# Altium PCB Acoustics Board.PcbDoc
Units mil, origin at the board's own origin, x right, y up, seen from the top; angles counter-clockwise.
Board outline 5000 x 3000 mil, 2 copper layers (Top Layer, Bottom Layer); 50 components, 24 nets, 214 pads, 9 vias.
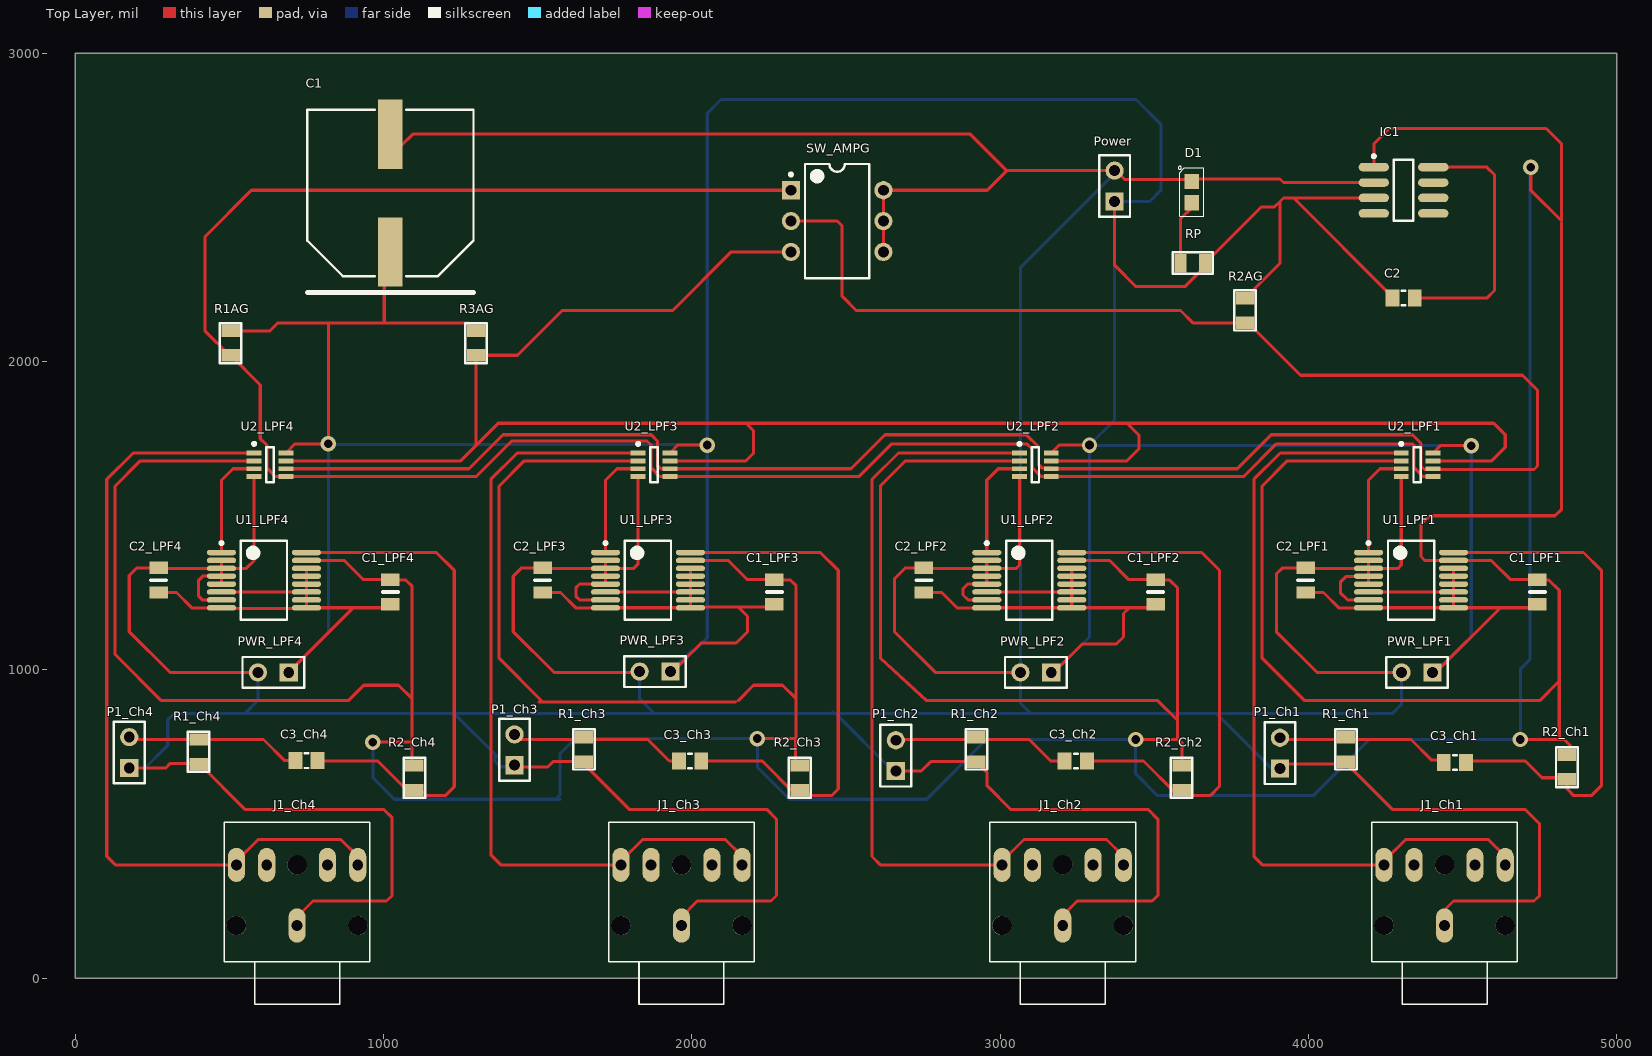
[diagram p0: Top Layer view]
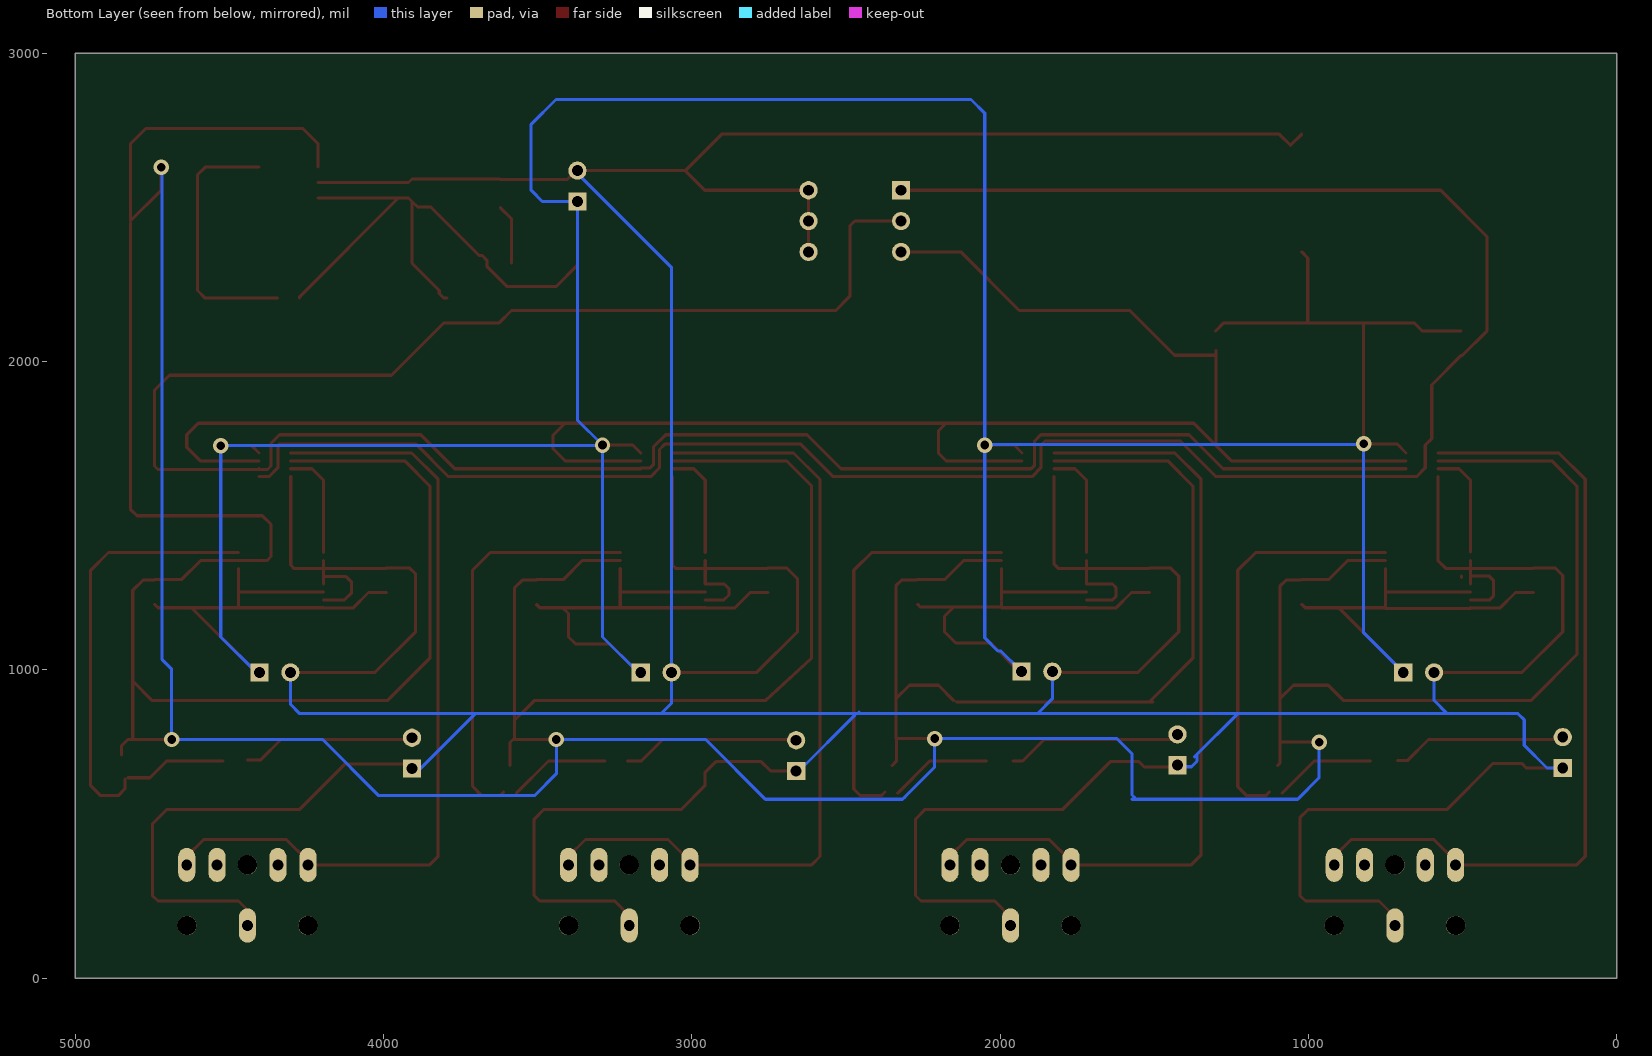
[diagram p1: Bottom Layer view, seen from below]

## Layer stack, top to bottom
Top Solder: solder mask 0.4, Solder Resist, Dk 3.5
Top Layer: signal copper 1.4
Dielectric 1: dielectric 12.6, FR-4, Dk 4.8
Bottom Layer: signal copper 1.4
Bottom Solder: solder mask 0.4, Solder Resist, Dk 3.5

## Board outline
0,0 5000,0 5000,3000 0,3000

## Design rules (kind name [scope] priority, off if disabled: settings)
Clearance [All] p1: gap=10 ignorepadtopadclearanceinfootprint=TRUE except(0: Arc-Hole Track-Hole SMDPad-Hole THPad-Hole Via-Hole Fill-Hole Poly-Hole Region-Hole Text-Hole)
PolygonConnect [All] p1: connectstyle=Relief reliefconductorwidth=10 reliefentries=4 polygonreliefangle="90 Angle" airgapwidth=10
RoomDefinition Ch2 [InComponentClass('Ch2')] p1: confinementstyle=ConfineIn formatcopy=TRUE lockcomponents=FALSE outline 2561.6,-150 3761.6,-150 3761.6,900 2561.6,900
RoomDefinition Ch1 [InComponentClass('Ch1')] p2: confinementstyle=ConfineIn formatcopy=TRUE lockcomponents=FALSE outline 3800,-150 5000,-150 5000,900 3800,900
RoomDefinition Ch4 [InComponentClass('Ch4')] p3: confinementstyle=ConfineIn formatcopy=TRUE lockcomponents=FALSE outline 77.85,-150 1277.85,-150 1277.85,900 77.85,900
RoomDefinition Ch3 [InComponentClass('Ch3')] p4: confinementstyle=ConfineIn formatcopy=TRUE lockcomponents=FALSE outline 1324.8,-150 2524.8,-150 2524.8,900 1324.8,900
RoomDefinition LPF4 [InComponentClass('LPF4')] p5: confinementstyle=ConfineIn formatcopy=TRUE lockcomponents=FALSE outline 79.16,919.84 1279.16,919.84 1279.16,1869.84 79.16,1869.84
RoomDefinition LPF3 [InComponentClass('LPF3')] p6: confinementstyle=ConfineIn formatcopy=TRUE lockcomponents=FALSE outline 1324.81,919.84 2524.81,919.84 2524.81,1869.84 1324.81,1869.84
RoomDefinition LPF2 [InComponentClass('LPF2')] p7: confinementstyle=ConfineIn formatcopy=TRUE lockcomponents=FALSE outline 2561.6,919.84 3761.6,919.84 3761.6,1869.84 2561.6,1869.84
RoomDefinition LPF1 [InComponentClass('LPF1')] p8: confinementstyle=ConfineIn formatcopy=TRUE lockcomponents=FALSE outline 3800,919.84 5000,919.84 5000,1869.84 3800,1869.84
RoomDefinition "Acoustics Board" [InComponentClass('Acoustics Board')] p9: confinementstyle=ConfineIn formatcopy=TRUE lockcomponents=FALSE outline 221.27,1930.75 4921.27,1930.75 4921.27,2941.01 221.27,2941.01
RoutingVias [All] p1: holewidth=28 width=50 viastyle="Through Hole" minholewidth=28 minwidth=50 maxholewidth=28 maxwidth=50
SolderMaskExpansion [All] p1: expansion=4
Width [All] p1: maxlimit=10 minlimit=10 preferedwidth=10
30 further rules are at their usual default settings.

## Classes and differential pairs
channel class "Low Pass Filter": LPF1 LPF2 LPF3 LPF4
channel class Channel: Ch1 Ch2 Ch3 Ch4
net class AMP_G_SEL[2..0]: AMP_G_SEL0 AMP_G_SEL1 AMP_G_SEL2
component class LPF4: C1_LPF4 C2_LPF4 PWR_LPF4 U1_LPF4 U2_LPF4
component class LPF3: C1_LPF3 C2_LPF3 PWR_LPF3 U1_LPF3 U2_LPF3
component class LPF2: C1_LPF2 C2_LPF2 PWR_LPF2 U1_LPF2 U2_LPF2
component class LPF1: C1_LPF1 C2_LPF1 PWR_LPF1 U1_LPF1 U2_LPF1
component class Ch4: C3_Ch4 J1_Ch4 P1_Ch4 R1_Ch4 R2_Ch4
component class Ch3: C3_Ch3 J1_Ch3 P1_Ch3 R1_Ch3 R2_Ch3
component class Ch2: C3_Ch2 J1_Ch2 P1_Ch2 R1_Ch2 R2_Ch2
component class Ch1: C3_Ch1 J1_Ch1 P1_Ch1 R1_Ch1 R2_Ch1
component class "Acoustics Board": C1 C2 D1 IC1 Power R1AG R2AG R3AG RP SW_AMPG

## Components (designator, comment, footprint, x,y, rotation, side; value= is the part's Value field where it differs from the comment)
C1 "220 uF" PNSC-FK-V-H13_V 1022,2546.69 r90 top
C1_LPF1 "0.10µF" SMD-0805C 4742.83,1252.63 r180 top (schematic designator C1)
C1_LPF2 "0.10µF" SMD-0805C 3504.44,1252.63 r180 top (schematic designator C1)
C1_LPF3 "0.10µF" SMD-0805C 2267.64,1252.63 r180 top (schematic designator C1)
C1_LPF4 "0.10µF" SMD-0805C 1022,1252.63 r180 top (schematic designator C1)
C2 "Cap" C0805 4308.52,2205.75 r0 top value=1uF
C2_LPF1 "0.10µF" SMD-0805C 3990.95,1291.02 r180 top (schematic designator C2)
C2_LPF2 "0.10µF" SMD-0805C 2752.55,1291.02 r180 top (schematic designator C2)
C2_LPF3 "0.10µF" SMD-0805C 1515.75,1291.02 r180 top (schematic designator C2)
C2_LPF4 "0.10µF" SMD-0805C 270.11,1291.02 r180 top (schematic designator C2)
C3_Ch1 "Cap" C0805 4475.4,700 r180 top value=10uF (schematic designator C3)
C3_Ch2 "Cap" C0805 3245.46,704.33 r180 top value=10uF (schematic designator C3)
C3_Ch3 "Cap" C0805 1994.06,704.33 r180 top value=10uF (schematic designator C3)
C3_Ch4 "Cap" C0805 750,705.34 r180 top value=10uF (schematic designator C3)
D1 "LED" LED0805 3621.27,2549.85 r180 top
IC1 "TLE2426" SO8_M 4308.52,2555.75 r0 top
J1_Ch1 "SJ1-3555NG" CUI_SJ1-3555NG 4441.54,170.67 r90 top (schematic designator J1)
J1_Ch2 "SJ1-3555NG" CUI_SJ1-3555NG 3203.14,170.67 r90 top (schematic designator J1)
J1_Ch3 "SJ1-3555NG" CUI_SJ1-3555NG 1966.34,170.67 r90 top (schematic designator J1)
J1_Ch4 "SJ1-3555NG" CUI_SJ1-3555NG 719.39,170.67 r90 top (schematic designator J1)
P1_Ch1 "Header 2" HDR1X2 3907.69,679.72 r90 top (schematic designator P1)
P1_Ch2 "Header 2" HDR1X2 2661.6,671.66 r90 top (schematic designator P1)
P1_Ch3 "Header 2" HDR1X2 1424.8,690.72 r90 top (schematic designator P1)
P1_Ch4 "Header 2" HDR1X2 175.11,681.73 r90 top (schematic designator P1)
Power "Header 2" HDR1X2 3371.26,2519.33 r90 top
PWR_LPF1 "Header 2" HDR1X2 4402.17,991.73 r180 top (schematic designator PWR)
PWR_LPF2 "Header 2" HDR1X2 3165.74,991.73 r180 top (schematic designator PWR)
PWR_LPF3 "Header 2" HDR1X2 1930.72,994.37 r180 top (schematic designator PWR)
PWR_LPF4 "Header 2" HDR1X2 692.31,991.73 r180 top (schematic designator PWR)
R1_Ch1 "10k" SMD-0805-RES 4121.47,741.73 r180 top (schematic designator R1)
R1_Ch2 "10k" SMD-0805-RES 2923.02,741.73 r180 top (schematic designator R1)
R1_Ch3 "10k" SMD-0805-RES 1650,741.73 r180 top (schematic designator R1)
R1_Ch4 "10k" SMD-0805-RES 400,734.01 r180 top (schematic designator R1)
R1AG "10k" SMD-0805-RES 503.81,2060.01 r0 top
R2_Ch1 "10k" SMD-0805-RES 4838.05,684.64 r0 top (schematic designator R2)
R2_Ch2 "10k" SMD-0805-RES 3588.89,650 r0 top (schematic designator R2)
R2_Ch3 "10k" SMD-0805-RES 2350,650 r0 top (schematic designator R2)
R2_Ch4 "10k" SMD-0805-RES 1100,650 r0 top (schematic designator R2)
R2AG "10k" SMD-0805-RES 3794.27,2165.75 r0 top
R3AG "10k" SMD-0805-RES 1300,2060 r0 top
RP "4.7k" SMD-0805-RES 3625,2319.17 r270 top
SW_AMPG "SW DIP-3" DIP-6 2471.27,2455.75 r0 top
U1_LPF1 "LTC1564IG#PBF" LT-G-16_M 4332.84,1291.01 r0 top (schematic designator U1)
U1_LPF2 "LTC1564IG#PBF" LT-G-16_M 3094.44,1291.01 r0 top (schematic designator U1)
U1_LPF3 "LTC1564IG#PBF" LT-G-16_M 1857.64,1291.01 r0 top (schematic designator U1)
U1_LPF4 "LTC1564IG#PBF" LT-G-16_M 612,1291.01 r0 top (schematic designator U1)
U2_LPF1 "LTC6910-3CTS8#TRPBF" LT-TS8-8-TSOT-23_V 4352.56,1665.16 r0 top (schematic designator U2)
U2_LPF2 "LTC6910-3CTS8#TRPBF" LT-TS8-8-TSOT-23_V 3114.17,1665.16 r0 top (schematic designator U2)
U2_LPF3 "LTC6910-3CTS8#TRPBF" LT-TS8-8-TSOT-23_V 1877.37,1665.16 r0 top (schematic designator U2)
U2_LPF4 "LTC6910-3CTS8#TRPBF" LT-TS8-8-TSOT-23_V 631.72,1665.16 r0 top (schematic designator U2)

## Footprints (in the part's own frame and the unit in brackets; to place one, negate y for a bottom-side part, rotate by r counter-clockwise, add the part's x,y. Pads: shape width x height; smd on the part's side, far side on the other; paste and mask are expansions set on the pad)
C0805 [mm] "Chip Capacitor, 2-Leads, Body 2.0x1.3mm, IPC Medium Density"
  rect 1.15x1.4 smd: 1(-0.925,0) 2(0.925,0)
  silkscreen extent -0.15,-0.6 0.15,0.6, body extent -1,-0.63 1,0.63, height 0.6
CUI_SJ1-3555NG [mm]
  oval 2.816x1.408 hole 0.9: 1(0,0) 2(5,-5) 3(5,5) 4(5,-2.5) 5(5,2.5)
  round 1.6 hole 1.6 unplated: None(0,5) None(0,-5) None(5,0)
  silkscreen extent -6.5,-6 8.5,6
DIP-6 [mm] "DIP; 6 Leads; Row Spacing 7.62 mm; Pitch 2.54 mm"
  rect 1.5x1.5 hole 0.9: 1(-3.81,2.54)
  round 1.5 hole 0.9: 2(-3.81,0) 3(-3.81,-2.54) 4(3.81,-2.54) 5(3.81,0) 6(3.81,2.54)
  silkscreen extent -3.93,-4.7 2.65,4.7, body extent -3.55,-4.7 3.55,4.7, height 5.46
HDR1X2 [mm] "Connector; Header; 2 Position"
  rect 1.5x1.5 hole 0.9: 1(0,0)
  round 1.5 hole 0.9: 2(2.54,0)
  silkscreen extent -1.27,-1.27 3.81,1.27
LED0805 [mm] "0805 LED"
  rect 1.2x1.25 smd: 1(0,-0.875) 2(0,0.875)
  silkscreen extent -1,-2.13 1.1,2
LT-G-16_M [mm] "SOP, 16-Leads, Body 6.2x5.3mm, Pitch 0.65mm, IPC Low Density"
  oval 2.4x0.45 smd: 1(-3.5,2.275) 2(-3.5,1.625) 3(-3.5,0.975) 4(-3.5,0.325) 5(-3.5,-0.325) 6(-3.5,-0.975) 7(-3.5,-1.625) 8(-3.5,-2.275) 9(3.5,-2.275) 10(3.5,-1.625) 11(3.5,-0.975) 12(3.5,-0.325) 13(3.5,0.325) 14(3.5,0.975) 15(3.5,1.625) 16(3.5,2.275)
  silkscreen extent -3.62,-3.25 1.9,3.25, body extent -2.8,-3.25 2.8,3.25, height 2
LT-TS8-8-TSOT-23_V [mm] "SOT23, 8-Leads, Body 2.90x1.63mm, Pitch 0.65mm, IPC High Density, Recommended"
  rect 1.22x0.4 smd: 1(-1.31,0.975) 2(-1.31,0.325) 3(-1.31,-0.325) 4(-1.31,-0.975) 5(1.31,-0.975) 6(1.31,-0.325) 7(1.31,0.325) 8(1.31,0.975)
  silkscreen extent -1.43,-1.45 0.3,1.85, body extent -0.87,-1.45 0.88,1.45, height 1
PNSC-FK-V-H13_V [mm] "CAPAE, 2-Leads, Body 13.70x13.70mm"
  rect 5.7x2 smd: 1(-4.85,0) 2(4.85,0)
  silkscreen extent -8.2,-6.85 6.85,6.85, body extent -7.5,-6.85 7.5,6.85, height 14
SMD-0805-RES [mil]
  rect 60x40 smd: 1(0,40) 2(0,-40)
  silkscreen extent -35,-65 35,65, body extent -24,-39 26,39, height 31
SMD-0805C [mil]
  rect 60x40 smd: 1(0,40) 2(0,-40)
  silkscreen extent -25,0 25,0, body extent -25,-39 25,39, height 35
SO8_M [mm] "SOIC, 8-Leads, Body 4.9x3.9mm, Pitch 1.27mm, IPC Low Density"
  oval 2.5x0.7 smd: 1(-2.45,1.905) 2(-2.45,0.635) 3(-2.45,-0.635) 4(-2.45,-1.905) 5(2.45,-1.905) 6(2.45,-0.635) 7(2.45,0.635) 8(2.45,1.905)
  silkscreen extent -2.57,-2.5 0.8,2.93, body extent -2,-2.5 2,2.5, height 1.75

## Part data
C1: library part CMP-2000-06222-1, "Aluminum Electrolytic Capacitor, 220 uF, +/- 20%, 63 V, 2-Pin SMD (Size Code H13), -55 to 105 degC, RoHS, Tape and Reel", AE Capacitor Case=RadialCan-SMD, Capacitance=220µF, Capacitance Tolerance=±20%, Capacitor Case Style=SMD, Life Time @ Temperature=2000hours@105°C, Manufacturer=Panasonic, Operating life Time=2000h, Operating Temperature Max=105°C, Operating Temperature Min=-55°C, Operating Temperature Range=-55°Cto+105°C, Package / Case=H13, Package Description="2-Pin Electrolytic Aluminum Capacitor, Body 13.5 x 13.5 mm", Package Reference=FK-V-H13, Power Factor=0.08, Power Factor Frequency=120Hz, Ripple Current AC=800mA, Ripple Current Frequency=100kHz, Tolerance +=20%, Voltage Rating=63V, Capacitance Tolerance ±=±20%, Capacitor Terminals=SMD, Datasheet URL=https://industrial.panasonic.com/cdbs/www-data/pdf/RDE0000/ABA0000C1181.pdf, Datasheet Version=03/2016, Diameter=12.5mm, External Length / Height=13.5mm, Height=13.5mm, Impedance=0.16ohm, Lifetime @ Temperature=2000hours@105°C, Manufacturer URL=http://www.panasonic.com/, Mounting Technology=SurfaceMount, Operating Lifetime=2000h, Package URL=http://industrial.panasonic.com/cdbs/www-data/pdf/RDE0000/DME0000COL48.pdf, Packaging=CutTape, Product Range=PANASONIC-?????FK, Ripple Current Temperature=105°C, Series=FK, SVHC=NoSVHC(16-Dec-2013), Tolerance -=20%, Voltage Rating V DC=63V
C1_LPF1 C1_LPF2 C1_LPF3 C1_LPF4 C2_LPF1 C2_LPF2 C2_LPF3 C2_LPF4: library part GCD21BR71H104KA01L, "CAP CER 0.1UF 50V X7R 0805", Digi-Key Part Number=490-11955-1-ND, Manufacturer="Murata Electronics North America", Operating Temperature="-55°C ~ 125°C", Package / Case="0805 (2012 Metric)", Ratings=AEC-Q200, Temperature Coefficient=X7R, Tolerance=±10%, Voltage=50V, @ qty=0, Applications=Automotive, Datasheets=http://www.murata.com/~/media/webrenewal/support/library/catalog/products/capacitor/mlcc/c03e.ashx, Factory Stock=0, Features=-, Height - Seated (Max)=-, Image=//media.digikey.com/Renders/Murata%20Renders/0805%28GxM6%29.jpg, Lead Spacing=-, Lead Style=-, Minimum Quantity=1, Mounting Type="Surface Mount, MLCC", Packaging="Cut Tape (CT)", Part Number=GCD21BR71H104KA01L, Part Status=Active, Quantity Available=157, Series=GCD, Size / Dimension="0.079\" L x 0.049\" W (2.00mm x 1.25mm)", Thickness (Max)="0.049\" (1.25mm)", Unit Price (USD)=0.24
C2 C3_Ch1 C3_Ch2 C3_Ch3 C3_Ch4: "Unpolarized Capacitor"
IC1: "in signal-conditioning applications utilizing a single power source a reference voltage equal to one-half the supply ...", Package="SOIC-8 Texas Instruments", Availability=Unavailable, MF="Texas Instruments", MP=TLE2426, Price=None, SnapEDA_Link=https://www.snapeda.com/parts/TLE2426/Texas%20Instruments/view-part/?ref=snap
P1_Ch1 P1_Ch2 P1_Ch3 P1_Ch4 Power PWR_LPF1 PWR_LPF2 PWR_LPF3 PWR_LPF4: "Header, 2-Pin", LatestRevisionDate=17-Jul-2002, LatestRevisionNote="Re-released for DXP Platform.", Publisher="Altium Limited"
R1_Ch1 R1_Ch2 R1_Ch3 R1_Ch4 R1AG R2_Ch1 R2_Ch2 R2_Ch3 R2_Ch4 R2AG R3AG RP: library part ERJ-6ENF1002V, "RES SMD 10K OHM 1% 1/8W 0805", Digi-Key Part Number=P10.0KCCT-ND, Manufacturer="Panasonic Electronic Components", Operating Temperature="-55°C ~ 155°C", Package / Case="0805 (2012 Metric)", Power (Watts)="0.125W, 1/8W", Supplier Device Package=0805, Temperature Coefficient=±100ppm/°C, Tolerance=±1%, @ qty=1500, Composition="Thick Film", Datasheets=http://industrial.panasonic.com/www-cgi/jvcr13pz.cgi?E+PZ+3+AOA0002+ERJ6ENF1002V+7+WW, Factory Stock=0, Failure Rate=-, Features="Automotive AEC-Q200", Height - Seated (Max)="0.028\" (0.70mm)", Image=//media.digikey.com/Renders/Panasonic%20Renders/ERJ-0805%20Pkg.jpg, Minimum Quantity=1, Number of Terminations=2, Packaging="Cut Tape (CT)", Part Number=ERJ-6ENF1002V, Part Status=Active, Quantity Available=3985614, Series=ERJ, Size / Dimension="0.079\" L x 0.049\" W (2.00mm x 1.25mm)", Unit Price (USD)=0.00729
SW_AMPG: "DIP Switch, 3 Position, SPST", Code_JEDEC=MO-001-AM, LatestRevisionDate=17-Jul-2002, LatestRevisionNote="Re-released for DXP Platform.", PackageReference=DIP-6, Published=24-Mar-1999, Publisher="Altium Limited"
U1_LPF1 U1_LPF2 U1_LPF3 U1_LPF4: library part CMP-0359-00059-2, "Single Channel, Digitally Controlled Antialiasing Filter and 4-Bit PGA, 0.15 MHz Typical GBW, 2.7 to 10.5 V, 16-Pin SOP (G16), Industrial, Pb-Free", Linear Technology Part Number=LTC1564, Manufacturer="Linear Technology", Channels (#)=1, ComponentLink1Description="Manufacturer URL", ComponentLink1URL=http://www.linear.com/, ComponentLink2Description=Datasheet, ComponentLink2URL=http://cds.linear.com/docs/en/datasheet/1564fa.pdf, ComponentLink3Description="Package Specification", ComponentLink3URL=http://cds.linear.com/docs/en/packaging/SSOP_16_05-08-1640.pdf, DatasheetVersion="Rev. A", GBW (MHz) Typical=0.15, Is (mA) Typical=15, Mounting Technology="Surface Mount", PackageDescription="16-Lead Plastic SSOP, Body 6.2 x 5.3 mm, Pitch 0.65 mm", PackageReference=LT-G-16, PartNumber=LTC1564IG#PBF, RevisionNote="URLs updated", RoHS=Pb-Free, Type=PGA, Vos (mV) Typical=3, Vs Max (V)=10.5, Vs Min (V)=2.7
U2_LPF1 U2_LPF2 U2_LPF3 U2_LPF4: library part CMP-0359-03721-2, "Single Channel, Digitally Controlled Programmable Gain Amplifier, 11 MHz Typical GBW, 16 V/us Typical SR, 2.7 to 11 V, 8-Pin SOT23 (TS8-8), Commercial, Pb-Free, Reel", Linear Technology Part Number=LTC6910-3, Manufacturer="Linear Technology", Channels (#)=1, Code_JEDEC=MO-193, ComponentLink1Description="Manufacturer URL", ComponentLink1URL=http://www.linear.com/, ComponentLink2Description=Datasheet, ComponentLink2URL=http://cds.linear.com/docs/en/datasheet/6910123fa.pdf, ComponentLink3Description="Package Specification", ComponentLink3URL=http://cds.linear.com/docs/en/packaging/SOT_8_05-08-1637.pdf, DatasheetVersion="Rev. A", GBW (MHz) Typical=11, Is (mA) Typical=2, Mounting Technology="Surface Mount", PackageDescription="8-Lead Plastic TSOT-23, Body 2.9 x 1.63 mm, Pitch 0.65 mm", PackageReference=LT-TS8-8-TSOT-23, PackageVersion="Rev A", Packing=Reel, PartNumber=LTC6910-3CTS8#TRPBF, RevisionNote="URLs updated", RoHS=Pb-Free, SR (V/us) Typical=16, Type=PGA, Vos (mV) Typical=3, Vs Max (V)=11, Vs Min (V)=2.7

## Via types
v1: diameter 50, hole 28, Top Layer to Bottom Layer, 9 vias

## Nets (pads, with @x,y where several pads share a name; then routed paths per layer and width w, separated by ;. In a path a pad name is that pad's centre, name@x,y a point inside that pad or via, vN(x,y) a via of type N, cw(c..) or ccw(c..) an arc to the next point about the centre after c; other vN are vias at no path point)
AGND_Ch1: C1_LPF1.2 C1_LPF2.2 C1_LPF3.2 C1_LPF4.2 IC1.1 R2_Ch1.1 R2_Ch2.1 R2_Ch3.1 R2_Ch4.1 U1_LPF1.15 U1_LPF2.15 U1_LPF3.15 U1_LPF4.15 U2_LPF1.2 U2_LPF2.2 U2_LPF3.2 U2_LPF4.2 | length 21869.5
  Top Layer w10: U2_LPF4.2 210.54,1677.95 129.16,1596.57 129.16,1050 279.16,900 885.93,900 935.93,950 1048.6,950 1092.74,905.86 ; U1_LPF4.15 872.6,1354.99 934.96,1292.63 C1_LPF4.2 1023.61,1291.01 1072.78,1291.01 1092.74,1271.05 1092.74,905.86 ; v1(965.45,765.36) 1092.74,765.36 ; R2_Ch4.1 1092.74,697.26 1092.74,765.36 ; 1503.63,896.24 2141.26,896.24 ; 1512.37,900 1374.81,1037.56 1374.81,1596.57 1456.19,1677.95 U2_LPF3.2 ; U1_LPF3.15 2118.24,1354.99 2180.6,1292.63 C1_LPF3.2 2269.25,1292.63 2270.87,1291.01 2319.73,1291.01 2338.39,1272.36 2338.39,905.86 ; 2150,900 2200,950 2294.25,950 2338.39,905.86 ; v1(2212.4,777.17) 2336.5,777.17 ; R2_Ch3.1 2336.5,703.5 2336.5,777.17 ; U2_LPF2.2 2692.98,1677.95 2611.6,1596.57 2611.6,1037.56 2761.6,900 3511.6,900 3575.19,836.42 ; U1_LPF2.15 3355.04,1354.99 3417.4,1292.63 C1_LPF2.2 3506.05,1291.01 3550,1291.01 3575.19,1265.83 3575.19,836.42 ; v1(3439.36,774.01) 3580.23,774.01 ; R2_Ch2.1@3589.89,689.38 3589.89,764.36 3580.23,774.01 ; IC1.1 4212.06,2705.75 4262.06,2755.75 4771.27,2755.75 4821.27,2705.75 4821.27,2455.75 4721.27,2555.75 v1(4721.27,2630.75) ; U2_LPF1.2 3931.38,1677.95 3850,1596.57 3850,1037.56 3987.56,900 4750,900 4813.58,963.58 ; v1(4687.6,774.01) 4818.63,774.01 ; 4821.27,2450 4821.27,1521.27 4800,1500 4393.11,1500 4365.12,1472.01 4365.12,1367.51 4377.64,1354.99 U1_LPF1.15 4593.43,1354.99 4655.8,1292.63 C1_LPF1.2 4744.45,1291.01 4780.31,1291.01 4813.58,1257.75 4813.58,963.58 ; R2_Ch1.1@4850,724.01 4850,753.41 4829.39,774.01 4818.63,774.01 ; 1092.74,765.36 1092.74,905.86 ; 2336.5,777.17 2338.39,779.06 2338.39,905.86 ; 3575.19,836.42 3575.19,779.06 3580.23,774.01 ; 4813.58,963.58 4813.58,779.06 4818.63,774.01
  Bottom Layer w10: v1(965.45,765.36) 965.45,650 1035.13,580.32 1572.44,580.32 ; 1563.7,585.39 1572.44,594.13 1572.44,727.96 1621.65,777.17 v1(2212.4,777.17) 2212.4,684.65 2311.66,585.39 ; 2307.99,585.39 2311.66,585.39 ; 2316.73,580.32 2311.66,585.39 ; 2320.41,580.32 2761.6,580.32 2955.3,774.01 v1(3439.36,774.01) 3439.36,663.1 3510.34,592.13 4015.55,592.13 4197.44,774.01 v1(4687.6,774.01) 4687.6,1002.38 4718.23,1033.01 v1@4718.23,2625
AMP_G_SEL0: R1AG.2 SW_AMPG.1 U2_LPF1.5 U2_LPF2.5 U2_LPF3.5 U2_LPF4.5 | length 6981.3
  Top Layer w10: R1AG.2@500,2020.01 421.27,2098.74 421.27,2405.75 571.27,2555.75 SW_AMPG.1 ; R1AG.2 600,1923.82 600,1750.15 620.96,1729.18 620.96,1655.16 649.35,1626.77 U2_LPF4.5 1300,1626.77 1415.82,1742.6 1854.5,1742.6 1867.91,1729.18 1867.91,1655.16 1896.3,1626.77 U2_LPF3.5 2541.73,1626.77 2648.07,1733.11 3086.13,1733.11 3104.72,1714.52 3104.72,1655.16 3133.1,1626.77 U2_LPF2.5 3789.61,1626.77 3895.95,1733.11 4337.25,1733.11 4343.11,1727.25 4343.11,1655.16 4371.5,1626.77 U2_LPF1.5
AMP_G_SEL1: R2AG.2 SW_AMPG.2 U2_LPF1.6 U2_LPF2.6 U2_LPF3.6 U2_LPF4.6 | length 7492.5
  Top Layer w10: U2_LPF4.6 1277.17,1652.36 1387.4,1762.6 1867.91,1762.6 1887.91,1742.6 1887.91,1663.81 1899.36,1652.36 U2_LPF3.6 2516.13,1652.36 2626.37,1762.6 3084.93,1762.6 3124.72,1722.81 3124.72,1664.87 3134.51,1655.08 3163.02,1655.08 U2_LPF2.6 3769.25,1652.36 3879.49,1762.6 4337.4,1762.6 4365.12,1734.88 4365.12,1661.44 4376.56,1650 4401.77,1650 U2_LPF1.6 4406.5,1650 4731.65,1650 4742.83,1661.18 4742.83,1907.17 4694.25,1955.75 3974.27,1955.75 3804.27,2125.75 R2AG.2 3625,2125.75 3585,2165.75 2533.26,2165.75 2487.4,2211.61 2487.4,2439.62 2471.27,2455.75 SW_AMPG.2
AMP_G_SEL2: R3AG.2 SW_AMPG.3 U2_LPF1.7 U2_LPF2.7 U2_LPF3.7 U2_LPF4.7 | length 6565.7
  Top Layer w10: U2_LPF4.7 1250,1677.95 1372.05,1800 2175.64,1800 ; 1300,1731.15 R3AG.2 R3AG.2@1300,2035 ; R3AG.2@1301,2020.64 1434.18,2020.64 1579.3,2165.75 1937.61,2165.75 2127.61,2355.75 SW_AMPG.3 ; U2_LPF3.7 2175.64,1677.95 2200,1702.31 2200,1775.64 2175.64,1800 ; U2_LPF2.7 3411.54,1677.95 3450,1716.41 3450,1761.54 3411.54,1800 ; U2_LPF1.7 4594.25,1677.95 4638.39,1722.09 4638.39,1762.6 4600.98,1800 3411.54,1800 ; 2175.64,1800 3411.54,1800
AMP_OUT_Ch1: J1_Ch1.2 J1_Ch1.3 U2_LPF1.1 | length 2654.2
  Top Layer w10: U2_LPF1.1 3908.74,1703.54 3823,1617.8 3823,395.24 3850.72,367.52 J1_Ch1.3 4244.69,378.95 4315.73,450 4583.62,450 4638.39,395.24 J1_Ch1.2
AMP_OUT_Ch2: J1_Ch2.2 J1_Ch2.3 U2_LPF2.1 | length 2654.6
  Top Layer w10: U2_LPF2.1 2670.35,1703.54 2584.6,1617.8 2584.6,395.24 2584.6,394.52 2611.6,367.52 J1_Ch2.3 3006.29,378.95 3077.34,450 3345.23,450 3399.99,395.24 J1_Ch2.2
AMP_OUT_Ch3: J1_Ch3.2 J1_Ch3.3 U2_LPF3.1 | length 2651.4
  Top Layer w10: U2_LPF3.1 1433.55,1703.54 1347.81,1617.8 1347.81,400 1380.28,367.52 J1_Ch3.3 1769.49,378.95 1840.54,450 2108.43,450 2163.19,395.24 J1_Ch3.2
AMP_OUT_Ch4: J1_Ch4.2 J1_Ch4.3 U2_LPF4.1 | length 2652.9
  Top Layer w10: U2_LPF4.1 187.9,1703.54 102.16,1617.8 102.16,395.24 129.88,367.52 J1_Ch4.3 522.54,378.95 593.59,450 861.48,450 916.24,395.24 J1_Ch4.2
GND: C1.2 C2_LPF1.2 C2_LPF2.2 C2_LPF3.2 C2_LPF4.2 D1.1 IC1.2 J1_Ch1.1 J1_Ch2.1 J1_Ch3.1 J1_Ch4.1 P1_Ch1.1 P1_Ch2.1 P1_Ch3.1 P1_Ch4.1 Power.2 PWR_LPF1.2 PWR_LPF2.2 PWR_LPF3.2 PWR_LPF4.2 R1_Ch1.1 R1_Ch2.1 R1_Ch3.1 R1_Ch4.1 SW_AMPG.4 SW_AMPG.5 SW_AMPG.6 U1_LPF1.2 U1_LPF1.3 U1_LPF1.4 U1_LPF1.5 U1_LPF1.7 U1_LPF2.2 U1_LPF2.3 U1_LPF2.4 U1_LPF2.5 U1_LPF2.7 U1_LPF3.2 U1_LPF3.3 U1_LPF3.4 U1_LPF3.5 U1_LPF3.7 U1_LPF4.2 U1_LPF4.3 U1_LPF4.4 U1_LPF4.5 U1_LPF4.7 U2_LPF1.4 U2_LPF2.4 U2_LPF3.4 U2_LPF4.4 | length 24153.2
  Top Layer w10: P1_Ch4.1@177.85,681.73 293.58,681.73 308.53,696.69 401.05,696.69 550.07,547.67 1000,547.67 1027.85,519.82 1027.85,268.35 1009.51,250 771,250 719.39,198.39 J1_Ch4.1 ; U1_LPF4.7 411.96,1227.04 400,1239 400,1290.68 413.13,1303.81 U1_LPF4.4 ; U1_LPF4.5 U1_LPF4.4 ; U1_LPF4.2 U1_LPF4.3 ; U1_LPF4.4@503.81,1300.09 U1_LPF4.4@503.81,1303.81 ; U2_LPF4.4 580.15,1354.99 554.56,1329.4 U1_LPF4.3 ; PWR_LPF4.2 307.12,991.73 175.11,1123.74 175.11,1306.13 200,1331.02 C2_LPF4.2 271.73,1329.4 U1_LPF4.3 ; C1.2 1058.41,2701.22 1094.83,2737.64 2902.96,2737.64 3021.27,2619.33 ; P1_Ch3.1@1424.8,684.65 1532.1,684.65 1549.81,702.36 1642.33,702.36 1797.02,547.67 2243.04,547.67 2274.8,515.9 2274.8,268.35 2256.46,250 2017.95,250 1966.34,198.39 J1_Ch3.1 ; U1_LPF3.7 1635.43,1227.04 1624.81,1237.67 1624.81,1267.59 1635.43,1278.22 U1_LPF3.5 U1_LPF3.4 U1_LPF3.3 ; U1_LPF3.2 U1_LPF3.3 ; U2_LPF3.4 1825.8,1343.81 1811.39,1329.4 U1_LPF3.3 ; PWR_LPF3.2@1837.96,991.73 1552.76,991.73 1420.75,1123.74 1420.75,1303.81 1447.97,1331.02 C2_LPF3.2 1517.38,1329.4 U1_LPF3.3 ; SW_AMPG.4 SW_AMPG.5 SW_AMPG.6 2957.68,2555.75 3021.27,2619.33 ; P1_Ch2.1 2744.46,671.66 2775.15,702.35 2922.02,702.35 2957.86,666.51 2957.86,623.62 3033.82,547.67 3479.83,547.67 3511.6,515.9 3511.6,268.35 3493.26,250 3250,250 3203.14,203.14 J1_Ch2.1 ; U1_LPF2.7 2895.58,1227.04 2879.56,1243.06 2879.56,1263.37 2894.4,1278.22 U1_LPF2.5 U1_LPF2.4 U1_LPF2.3 ; U1_LPF2.2 U1_LPF2.3 ; U2_LPF2.4 3062.59,1340.03 3050.92,1328.36 2957.69,1328.36 U1_LPF2.3 ; PWR_LPF2.2@3074.76,991.73 PWR_LPF2.2 2789.56,991.73 2657.55,1123.74 2657.55,1295.59 2692.98,1331.02 C2_LPF2.2 2754.17,1329.4 U1_LPF2.3 ; P1_Ch1.1 3921.98,694.02 4125.87,694.02 4272.21,547.67 4702.33,547.67 4750,500 4750,268.35 4731.65,250 4470.63,250 4441.54,220.9 J1_Ch1.1 ; U1_LPF1.7 4126.7,1227.04 4103.74,1250 4103.74,1284.61 4121.47,1302.33 4193.56,1302.33 U1_LPF1.4 ; U1_LPF1.5 U1_LPF1.4 ; U1_LPF1.2 U1_LPF1.3 ; IC1.2 3919.1,2580.75 3907.69,2592.17 3623.24,2592.17 3621.27,2590.2 3405.1,2590.2 3375.96,2619.33 Power.2 3021.27,2619.33 ; U2_LPF1.4 4300.99,1340.03 4289.31,1328.36 4196.08,1328.36 U1_LPF1.3 ; PWR_LPF1.2@4313.15,991.73 PWR_LPF1.2 4027.95,991.73 3895.95,1123.74 3895.95,1310.7 3916.27,1331.02 C2_LPF1.2 3992.57,1329.4 U1_LPF1.3 ; U1_LPF4.4 U1_LPF4.3 ; U1_LPF1.4 U1_LPF1.3
  Bottom Layer w10: P1_Ch4.1 226.21,681.73 300,755.53 300,837.9 320.13,858.03 550,858.03 ; PWR_LPF4.2 592.31,900.34 550,858.03 ; 1361.36,722.54 1361.36,703.79 1379.44,685.7 P1_Ch3.1@1431.35,685.7 ; 1370.1,717.47 1229.54,858.03 ; 1830.72,858.03 1229.54,858.03 ; PWR_LPF3.2 1830.72,906.05 1878.74,858.03 ; 1830.91,858.03 1878.74,858.03 ; 2457.6,863.1 2462.67,858.03 ; 2471.41,852.95 2652.7,671.66 P1_Ch2.1 ; Power.2@3380.27,2619.33 3065.74,2304.81 PWR_LPF2.2 3065.74,892.29 3100,858.03 ; P1_Ch1.1 3881.07,679.72 3702.77,858.03 ; PWR_LPF1.2 4302.17,887.98 4272.21,858.03 3702.77,858.03 ; 550,858.03 1229.54,858.03 ; 1878.74,858.03 2462.67,858.03 ; 2462.67,858.03 2466.34,858.03 3100,858.03 ; 3100,858.03 3702.77,858.03
HPF_IN_UNBIASED_Ch1: C3_Ch1.2 P1_Ch1.2 R1_Ch1.2 | length 561.1
  Top Layer w10: P1_Ch1.2@3907.69,774.01 4332.48,774.01 4398.24,708.25 C3_Ch1.2@4441.54,708.25
HPF_IN_UNBIASED_Ch2: C3_Ch2.2 P1_Ch2.2 R1_Ch2.2 | length 576.3
  Top Layer w10: P1_Ch2.2@2661.6,774.01 3094.09,774.01 3163.77,704.33 C3_Ch2.2
HPF_IN_UNBIASED_Ch3: C3_Ch3.2 P1_Ch3.2 R1_Ch3.2 | length 584.2
  Top Layer w10: P1_Ch3.2@1415.82,806.73 1448.54,774.01 1857.29,774.01 1926.97,704.33 C3_Ch3.2
HPF_IN_UNBIASED_Ch4: C3_Ch4.2 P1_Ch4.2 R1_Ch4.2 | length 564
  Top Layer w10: P1_Ch4.2@175.11,774.01 R1_Ch4.2 610.34,774.01 679.02,705.34 C3_Ch4.2@710.63,705.34
LPF_IN_Ch1: C3_Ch1.1 R2_Ch1.2 U1_LPF1.16 | length 1698.1
  Top Layer w10: U1_LPF1.16 4892.13,1380.58 4950,1322.71 4950,624.41 4917.72,592.13 4860.63,592.13 4839.05,613.71 R2_Ch1.2@4839.05,645.28 ; C3_Ch1.1@4520.28,704.33 4703.4,704.33 4757.73,650 R2_Ch1.2@4829.39,650
LPF_IN_Ch2: C3_Ch2.1 R2_Ch2.2 U1_LPF2.16 | length 1652.8
  Top Layer w10: U1_LPF2.16 3653.73,1380.58 3711.6,1322.71 3711.6,622.63 3681.1,592.13 3622.24,592.13 R2_Ch2.2@3610.42,603.94 ; C3_Ch2.1 3465,704.33 R2_Ch2.2@3569.33,600
LPF_IN_Ch3: C3_Ch3.1 R2_Ch3.2 U1_LPF3.16 | length 1658
  Top Layer w10: U1_LPF3.16 2416.93,1380.58 2474.81,1322.71 2474.81,613.76 2453.18,592.13 2385.44,592.13 R2_Ch3.2@2373.62,603.94 ; C3_Ch3.1@2045.08,704.33 2228.2,704.33 R2_Ch3.2@2332.53,600
LPF_IN_Ch4: C3_Ch4.1 R2_Ch4.2 U1_LPF4.16 | length 1654.9
  Top Layer w10: U1_LPF4.16 1171.29,1380.58 1229.16,1322.71 1229.16,621.29 1200,592.13 1138.49,592.13 R2_Ch4.2@1126.67,603.94 ; C3_Ch4.1@798.13,704.33 981.25,704.33 R2_Ch4.2@1085.58,600
LPF_TO_AMP_LPF1: U1_LPF1.1 U2_LPF1.3 | length 356
  Top Layer w10: U1_LPF1.1 4195.04,1615.24 4232.17,1652.36 U2_LPF1.3
LPF_TO_AMP_LPF2: U1_LPF2.1 U2_LPF2.3 | length 356
  Top Layer w10: U1_LPF2.1 2956.65,1615.24 2993.77,1652.36 U2_LPF2.3
LPF_TO_AMP_LPF3: U1_LPF3.1 U2_LPF3.3 | length 356
  Top Layer w10: U1_LPF3.1 1719.85,1615.24 1756.97,1652.36 U2_LPF3.3
LPF_TO_AMP_LPF4: U1_LPF4.1 U2_LPF4.3 | length 353.5
  Top Layer w10: U1_LPF4.1@474.2,1383.04 474.2,1615.24 511.33,1652.36 U2_LPF4.3
NetC2_2: C2.2 IC1.8 | length 853.4
  Top Layer w10: C2.2 4578.8,2205.75 4603.8,2230.75 4603.8,2605.75 4578.79,2630.75 IC1.8
NetD1_2: D1.2 RP.2 | length 195.3
  Top Layer w10: RP.2 3585,2463.16 D1.2@3621.27,2499.43
V+: C1.1 C1_LPF1.1 C1_LPF2.1 C1_LPF3.1 C1_LPF4.1 C2.1 C2_LPF1.1 C2_LPF2.1 C2_LPF3.1 C2_LPF4.1 IC1.3 Power.1 PWR_LPF1.1 PWR_LPF2.1 PWR_LPF3.1 PWR_LPF4.1 R1AG.1 R2AG.1 R3AG.1 RP.1 U1_LPF1.6 U1_LPF1.8 U1_LPF1.9 U1_LPF1.10 U1_LPF1.11 U1_LPF1.12 U1_LPF1.13 U1_LPF1.14 U1_LPF2.6 U1_LPF2.8 U1_LPF2.9 U1_LPF2.10 U1_LPF2.11 U1_LPF2.12 U1_LPF2.13 U1_LPF2.14 U1_LPF3.6 U1_LPF3.8 U1_LPF3.9 U1_LPF3.10 U1_LPF3.11 U1_LPF3.12 U1_LPF3.13 U1_LPF3.14 U1_LPF4.6 U1_LPF4.8 U1_LPF4.9 U1_LPF4.10 U1_LPF4.11 U1_LPF4.12 U1_LPF4.13 U1_LPF4.14 U2_LPF1.8 U2_LPF2.8 U2_LPF3.8 U2_LPF4.8 | length 19496.3
  Top Layer w10: C2_LPF4.1 328.14,1251.02 379.16,1200 472.75,1200 U1_LPF4.8 ; U1_LPF4.8@474.2,1198.99 U1_LPF4.9@749.79,1198.99 ; U1_LPF4.6 U1_LPF4.11 ; R1AG.1@504.81,2099.38 631.08,2099.38 657.45,2125.75 820.19,2125.75 820.95,2125 v1(820.95,1733.11) 712.86,1733.11 U2_LPF4.8 ; PWR_LPF4.1 902.03,1201.45 ; U1_LPF4.14 U1_LPF4.13 U1_LPF4.12 U1_LPF4.11 ; 820.95,2125.75 1002.31,2125.75 ; C1_LPF4.1 1010.82,1201.45 902.03,1201.45 ; C1.1 1002.31,2336.06 1002.31,2125.75 ; R3AG.1@1301,2099.38 1274.62,2125.75 1002.31,2125.75 ; C2_LPF3.1 1573.78,1251.02 1624.81,1200 U1_LPF3.8@1718.4,1200 ; U1_LPF3.8@1718.4,1202.64 1719.59,1201.45 U1_LPF3.8 U1_LPF3.9 ; U1_LPF3.6 U1_LPF3.11 ; U2_LPF3.8 1954.58,1729.18 v1(2050,1729.18) ; PWR_LPF3.1@1937.96,994.37 2030.48,1086.89 2143.75,1086.89 2180.6,1123.74 2180.6,1173.49 2150,1204.09 ; U1_LPF3.10@1995.44,1220.72 1995.44,1204.09 2150,1204.09 ; U1_LPF3.10 U1_LPF3.11 ; U1_LPF3.14 U1_LPF3.13 U1_LPF3.12 U1_LPF3.11 ; C1_LPF3.1 2259.1,1204.09 2150,1204.09 ; C2_LPF2.1 2810.58,1251.02 2861.6,1200 U1_LPF2.8@2955.2,1200 ; U1_LPF2.8 U1_LPF2.9 ; U1_LPF2.6 U1_LPF2.11 ; PWR_LPF2.1@3151.76,986.61 PWR_LPF2.1@3153.21,988.06 ; U2_LPF2.8 3191.38,1729.18 v1(3289.76,1729.18) ; PWR_LPF2.1@3174.76,991.73 3267.28,1084.25 3377.51,1084.25 3399.99,1106.73 3399.99,1182.74 3418.69,1201.45 ; U1_LPF2.14 U1_LPF2.13 U1_LPF2.12 U1_LPF2.11 ; Power.1 3371.26,2312.5 3440.6,2243.15 3598.98,2243.15 3665,2309.17 RP.1 3665,2329.17 3680,2344.17 3690,2344.17 3847.53,2501.7 3890.05,2501.7 3907.69,2519.33 ; C1_LPF2.1 3493.26,1201.45 3418.69,1201.45 ; R2AG.1 3804.27,2205.75 3819.27,2220.75 3819.27,2230.75 3907.69,2319.17 3907.69,2519.33 ; C2_LPF1.1 4048.98,1251.02 4100,1200 4193.59,1200 U1_LPF1.8 U1_LPF1.9 ; U1_LPF1.6 U1_LPF1.11 ; IC1.3 3952.02,2530.75 ; C2.1 4272.1,2210.67 3952.02,2530.75 ; U2_LPF1.8 4427.84,1727.25 v1(4528.15,1727.25) ; PWR_LPF1.1@4413.15,991.73 4620.06,1198.64 ; U1_LPF1.14 U1_LPF1.13 U1_LPF1.12 U1_LPF1.11 ; C1_LPF1.1 4731.65,1201.45 U1_LPF1.9 ; U1_LPF4.11 U1_LPF4.10 U1_LPF4.9 902.03,1201.45 ; U1_LPF2.9 U1_LPF2.10 U1_LPF2.11 ; U1_LPF2.9 3418.69,1201.45 ; 3907.69,2519.33 3919.1,2530.75 3952.02,2530.75 ; U1_LPF1.9 U1_LPF1.10 U1_LPF1.11
  Bottom Layer w10: PWR_LPF4.1 820.95,1120.37 v1(820.95,1733.11) 822.91,1731.15 2048.04,1731.15 v1(2050,1729.18) ; PWR_LPF3.1@1937.96,991.73 1937.96,1001.61 1997.68,1061.34 2007.56,1061.34 2050,1103.78 v1(2050,1729.18) ; PWR_LPF2.1@3174.76,991.73 3289.76,1106.73 v1(3289.76,1729.18) ; Power.1 3371.26,1810.69 v1(3289.76,1729.18) ; Power.1@3399.99,2519.33 3484.85,2519.33 3521.27,2555.75 3521.27,2769.33 3440.6,2850 2094.25,2850 2050,2805.75 v1(2050,1729.18) ; PWR_LPF1.1@4413.15,991.73 4528.15,1106.73 v1(4528.15,1727.25) 4527.19,1728.22 3290.72,1728.22 v1(3289.76,1729.18)
pads on no net: IC1.4 IC1.5 IC1.6 IC1.7 J1_Ch1.4 J1_Ch1.5 J1_Ch1.None J1_Ch2.4 J1_Ch2.5 J1_Ch2.None J1_Ch3.4 J1_Ch3.5 J1_Ch3.None J1_Ch4.4 J1_Ch4.5 J1_Ch4.None